# Altium PCB PCB2.PcbDoc (part 1 of 2)
Units mm, origin at the board's own origin, x right, y up, seen from the top; angles counter-clockwise.
Board outline 150 x 116.5 mm, 2 copper layers (Top Layer, Bottom Layer); 107 components, 88 nets, 407 pads, 607 vias.
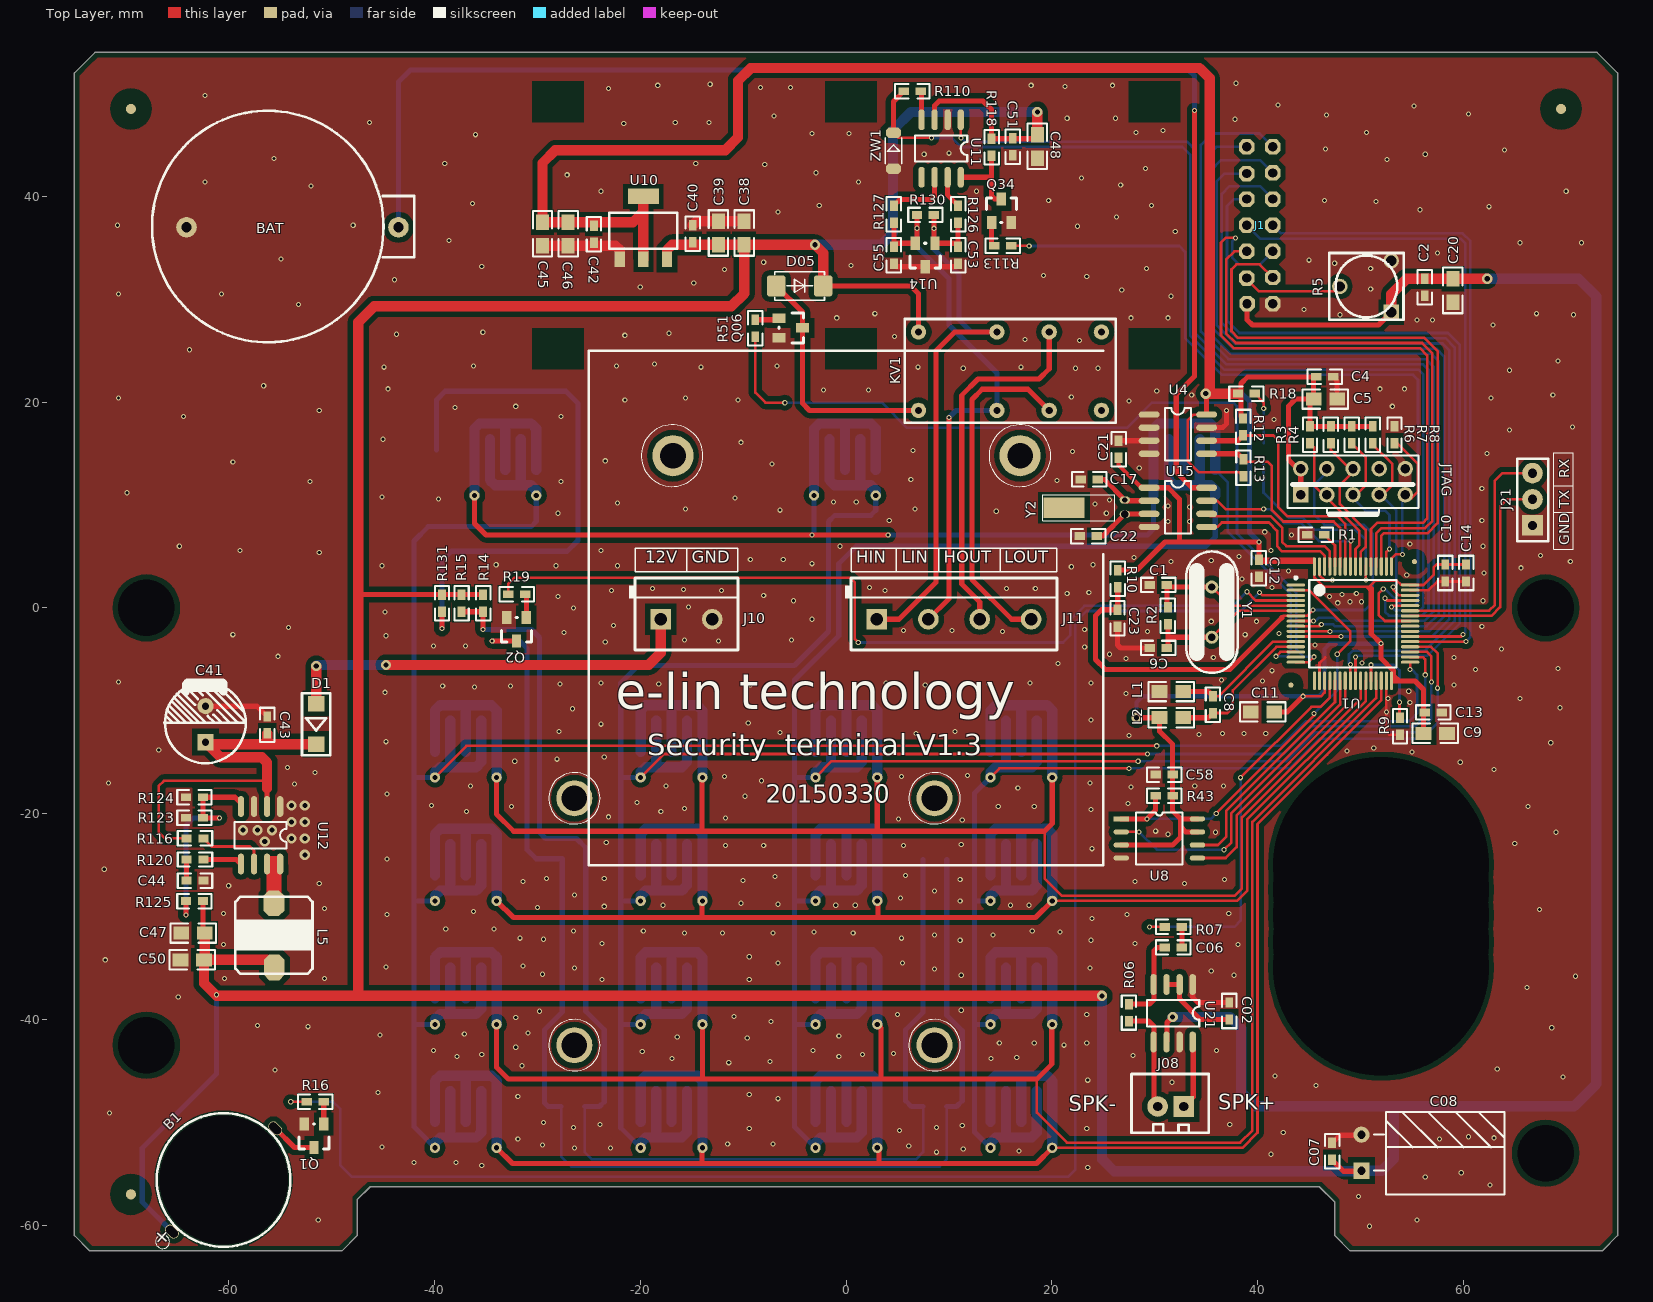
[diagram p0: Top Layer view]
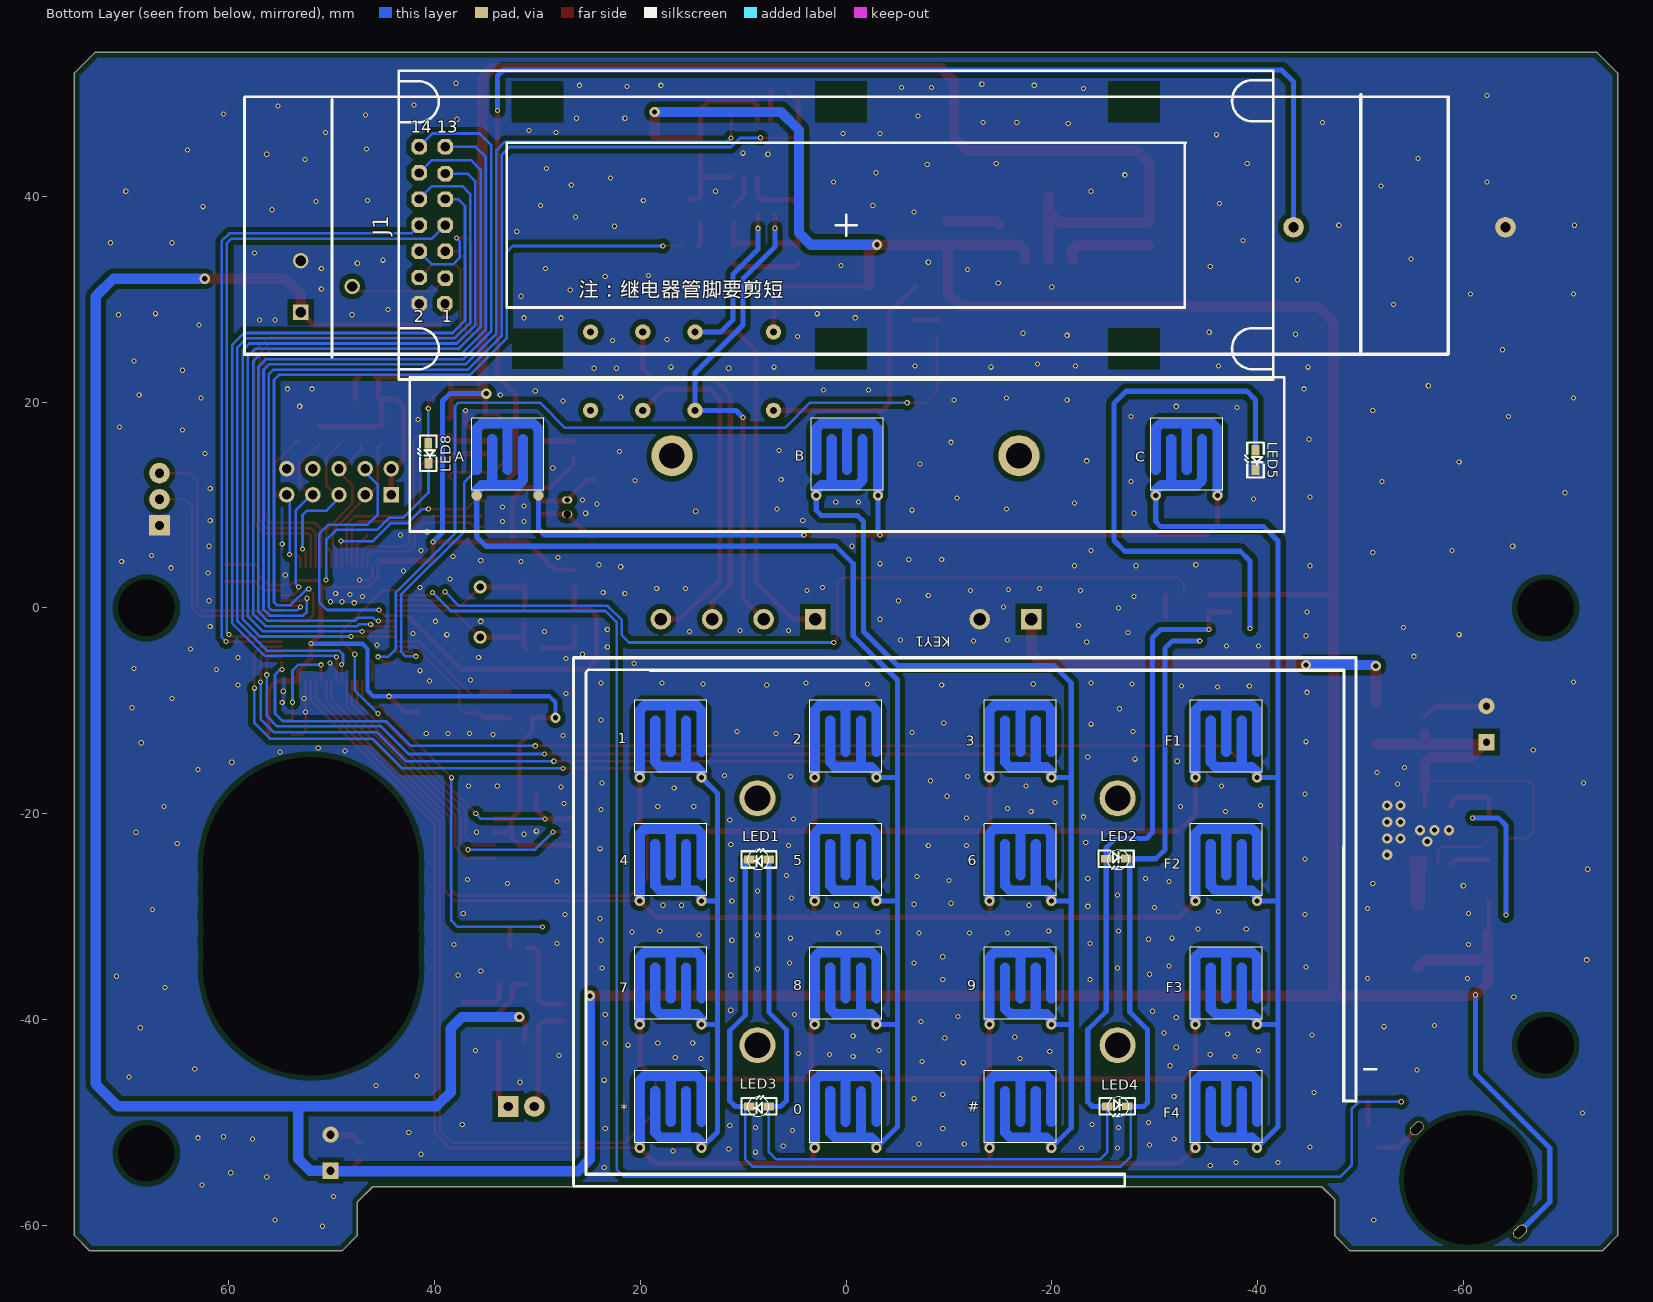
[diagram p1: Bottom Layer view, seen from below]

## Layer stack, top to bottom
Top Solder: solder mask 0.0102, Solder Resist, Dk 3.5
Top Layer: signal copper 0.0356
Dielectric1: dielectric 0.32, FR-4, Dk 4.8
Bottom Layer: signal copper 0.0356
Bottom Solder: solder mask 0.0102, Solder Resist, Dk 3.5

## Board outline
-75,-61 -73.5,-62.5 -49,-62.5 -47.5,-61 -47.5,-57.5 -46.25,-56.25 46,-56.25 47.5,-57.75 47.5,-61 49,-62.5 73.5,-62.5 75,-61 75,52 73,54 -73,54 -75,52

## Design rules (kind name [scope] priority, off if disabled: settings)
Clearance [All] p1: gap=0.5
PolygonConnect [All] p1: connectstyle=Direct reliefconductorwidth=0.5 reliefentries=4 polygonreliefangle="90 Angle" airgapwidth=0.254
RoutingVias [All] p1: holewidth=0.711 width=1.27 viastyle="Through Hole" minholewidth=0.711 minwidth=1.27 maxholewidth=0.711 maxwidth=1.27
SilkToSolderMaskClearance SilkscreenOverComponentPads [IsPad] p1: minsilkscreentomaskgap=0.254 clearancetoexposedcopper=TRUE
SolderMaskExpansion [All] p1: expansion=0.102
Width [All] p1: maxlimit=5 minlimit=0.254 preferedwidth=0.254
28 further rules are at their usual default settings.

## Classes and differential pairs
component class SCH1: BAT C17 C21 C22 C58 R12 R13 R43 U4 U8 U15 Y2
component class SCH2: C02 C06 C07 C08 J08 R06 R07 U21
component class SCH3: B1 C4 C5 C9 C10 C11 C12 C13 C14 C23 J21 JTAG Q1 R3 R4 R6 R7 R8 R10 R16
component class SCH4: C48 C51 C53 C55 D05 J10 J11 KV1 Q06 Q34 R51 R110 R113 R118 R126 R127 R130 U11 U14 ZW1
component class SCH5: C38 C39 C40 C41 C42 C43 C44 C45 C46 C47 C50 D1 L5 LED5 R116 R120 R123 R124 R125 R131 U10 U12
component class SCH6: C2 C20 J1 R5
component class SCH7: KEY1 LED1 LED2 LED3 LED4 Q2 R14 R15 R19
component class SCH8: C1 C6 C8 L1 L2 LED8 R1 R2 R9 R18 U1 Y1

## Components (designator, comment, footprint, x,y, rotation, side; value= is the part's Value field where it differs from the comment)
B1 "BEEP" BEEP-W -60.5,-55.6 r45 top
BAT "BAT-CR2032" CR2032 -43.5,37 r270 top
C1 "22pF" 0603 29.54,2.235 r0 top
C02 "0.1uF" 0603 37.25,-40 r90 top
C2 "0.1uF" 0603 56.25,30.349 r90 top
C4 "0.1uF" 0603 47.344,22.464 r180 top
C5 "10uF" 0805 45.452,20.302 r0 top
C06 "0.1uF" 0603 31,-33 r0 top
C6 "22pF" 0603 29.54,-3.886 r0 top
C07 "0.1uF" 0603 47.25,-52 r270 top
C08 "470uF/25V" RB3.5-W 52.5,-47.7 r90 top
C8 "0.1uF" 0603 35.668,-10.216 r90 top
C9 "10uF" 0805 56.134,-12.192 r0 top
C10 "0.1uF" 0603 58.24,2.572 r90 top
C11 "10uF" 0805 41.631,-10.109 r180 top
C12 "0.1uF" 0603 40.132,3.048 r90 top
C13 "0.1uF" 0603 57.912,-10.16 r180 top
C14 "0.1uF" 0603 60.272,2.572 r90 top
C17 "22pF" 0603 22.8,12.5 r0 top
C20 "10uF" 0805 58.983,32 r270 top
C21 "0.1uF" 0603 26.5,16.25 r270 top
C22 "22pF" 0603 22.733,6.985 r0 top
C23 "0.1uF" 0603 26.391,-1.829 r90 top
C38 "10uF" 0805 -9.9,35.3 r90 top
C39 "10uF" 0805 -12.4,35.3 r90 top
C40 "0.1uF" 0603 -14.9,37.2 r270 top
C41 "470uF/25V" RB3.5 -62.25,-9.55 r270 top
C42 "0.1uF" 0603 -24.5,35.5 r90 top
C43 "0.1uF" 0603 -56.25,-10.55 r270 top
C44 "1nF" 0603 -62.451,-26.5 r180 top
C45 "10uF" 0805 -29.5,37.5 r270 top
C46 "10uF" 0805 -27,37.5 r270 top
C47 "10uF" 0805 -64.6,-31.6 r0 top
C48 "10uF" 0805 18.6,46 r270 top
C50 "10uF" 0805 -62.4,-34.2 r180 top
C51 "0.1uF" 0603 16.2,44 r90 top
C53 "470pF" 0603 10.9,33.45 r90 top
C55 "470pF" 0603 4.65,33.45 r90 top
C58 "0.1uF" 0603 30.1,-16.2 r0 top
D1 "IN4007" SMA(DO-214AC) -51.5,-9.3 r270 top
D05 "1N4007" DO-214AC(SMA) -4.5,31.3 r0 top
J1 "LCD-1602DB" LCD-1602B 43.485,22.2 r0 top
J08 "XH2.54-2P" 2.54 27.75,-51 r0 top
J10 "5.0-2P" 5.0-2 -18,-1.1 r0 top
J11 "5.0-4P" 5.0-4 3,-1.1 r0 top
J21 "2.54*3P插针" 2.54-TX 68.25,6.5 r90 top
JTAG "JTAG" JTAG_10 44.2,11 r0 top
KEY1 "SW-17" KEY-17 -2.032,-18.796 r0 top
KV1 "OMRON" KV 7.25,19 r0 top
L1 "100R" 0805 30.48,-8.128 r0 top
L2 "100R" 0805 30.48,-10.668 r0 top
L5 "4.7uH" "INDUCTOR 7*7" -55.6,-28.7 r90 top
LED1 "RED" LED-0603 7.5,-24.45 r0 bottom
LED2 "RED" LED-0603 -25.3,-24.384 r180 bottom
LED3 "RED" LED-0603 7.5,-48.45 r0 bottom
LED4 "RED" LED-0603 -25.4,-48.45 r180 bottom
LED5 "RED" LED-0603 -39.802,15.342 r270 bottom
LED8 "RED" LED-0603 40.6,16 r270 bottom
Q1 "8050" SOT-23 -50.758,-50.171 r180 top
Q2 "8050" SOT-23 -31.071,-0.912 r180 top
Q06 "8050" SOT-23 -6.528,28.169 r270 top
Q34 "8050" SOT-23 14.15,37.45 r0 top
R1 "10K" 0603 46.5,7.112 r180 top
R2 "1M" 0603 31.284,-1.567 r90 top
R3 "10K" 0603 45.098,17.65 r270 top
R4 "10K" 0603 47.13,15.999 r90 top
R5 "10K" RM065-V1 48,31.25 r0 top
R06 "33K" 0603 27.5,-38.5 r270 top
R6 "10K" 0603 49.162,17.65 r270 top
R07 "10K" 0603 31,-31 r0 top
R7 "10K" 0603 51.194,17.65 r270 top
R8 "10K" 0603 53.315,17.678 r270 top
R9 "10K" 0603 53.848,-12.319 r90 top
R10 "10K" 0603 26.416,2.032 r90 top
R12 "4.7K" 0603 38.6,16.764 r90 top
R13 "4.7K" 0603 38.633,14.453 r270 top
R14 "510R" 0603 -35.267,-0.37 r90 top
R15 "510R" 0603 -37.367,-0.37 r90 top
R16 "1K" 0603 -52.4,-48 r0 top
R18 "1K" 0603 39.751,20.828 r180 top
R19 "1K" 0603 -31.167,1.33 r180 top
R43 "10K" 0603 30.099,-18.25 r0 top
R51 "1K" 0603 -8.814,26.365 r90 top
R110 "120R" 0603 7.264,50.216 r180 top
R113 "1K" 0603 14.4,35.2 r0 top
R116 "10K" 0603 -62.451,-22.4 r180 top
R118 "1K" 0603 14.15,43.95 r90 top
R120 "20K" 0603 -64.101,-24.45 r0 top
R123 "20K" 0603 -64.151,-20.4 r0 top
R124 "22K" 0603 -64.151,-18.4 r0 top
R125 "56K" 0603 -64.151,-28.5 r0 top
R126 "10R" 0603 10.9,37.45 r90 top
R127 "10R" 0603 4.65,37.45 r90 top
R130 "120R" 0603 6.9,38.2 r0 top
R131 "1K" 0603 -39.268,-0.356 r90 top
U1 "STM32F103RCT6" LQFP64_N 49.276,-1.524 r0 top
U4 "24C256" SO-8 29.464,18.796 r0 top
U8 "SST25VF016B" SOIC-8 26.75,-20.5 r0 top
U10 "LM1117-3.3V" SOT-223 -22,33.9 r0 top
U11 "TJA1050" SO-8 11.15,47.45 r270 top
U12 "AOZ1016" SO-8 -55,-19.3 r270 top
U14 "NUP2105L" SOT-23 8.65,35.45 r180 top
U15 "DS1302" SO-8 29.464,11.684 r0 top
U21 "8002" SO-8 33.7,-36.6 r270 top
Y1 "8MHz" XTAL_US 35.56,2.032 r270 top
Y2 "CRYSTAL" CS206 27.1,9.1 r0 top
ZW1 "3.3V" LL-34 4.623,42.697 r90 top

## Footprints (in the part's own frame and the unit in brackets; to place one, negate y for a bottom-side part, rotate by r counter-clockwise, add the part's x,y. Pads: shape width x height; smd on the part's side, far side on the other; paste and mask are expansions set on the pad)
2.54 [mm]
  rect 2x2 hole 0.9: 1(5.08,2.54)
  round 2 hole 0.9: 2(2.54,2.54)
  silkscreen extent 0,0 7.5,5.7
2.54-TX [mm]
  round 2 hole 0.9: 1(6.604,1.524) 2(4.064,1.524)
  rect 2x2 hole 0.9: 3(1.524,1.524)
  silkscreen extent 0,0 8,3
5.0-2 [mm]
  rect 2x2 hole 1.2: 1(0,0)
  round 2 hole 1.2: 2(5,0)
  silkscreen extent -3.1,-3 7.5,4
5.0-4 [mm]
  rect 2x2 hole 1.2: 1(0,0)
  round 2 hole 1.2: 2(5,0) 3(10,0) 4(15,0)
  silkscreen extent -3.1,-3 17.5,4
0603 [mil]
  rect 40x30 smd: 1(0,0) 2(65,0)
  silkscreen extent -33,-28 98,28
0805 [mil]
  rect 60x50 smd: 1(0,0) 2(90,0)
  silkscreen extent -42,-37 132,37
BEEP-W [mm]
  oval 1x1.5 hole 0.8 slot 1.3 at 90 deg: 1(-7.1,0) 2(7.1,0)
  round 0 hole 12.5: ""(0,0)
  silkscreen extent -6.5,-6.5 6.5,6.5
CR2032 [mm]
  round 2 hole 1: 1(0,0) 2(0,-20.6)
  silkscreen extent -11.32,-23.95 11.18,1.52
CS206 [mm]
  oval 1x0.7 hole 0.7: 1(0,0)
  oval 1x0.7 hole 0.5: 2(0,1.4)
  rect 4x2 smd: 3(-5.9,0.65)
  silkscreen extent -8,-0.6 -1,1.9
DO-214AC(SMA) [mil]
  rrect25% 70x80 smd: 1(-90,0) 2(90,0)
  silkscreen extent -95,-55 95,55, body extent -108,-55 108,55, height 91
"INDUCTOR 7*7" [mm]
  oct 2.5x2 smd: 1(0,0) 2(-6.239,-0.026)
  silkscreen extent -6.86,-3.74 0.64,3.76
JTAG_10 [mm]
  rect 1.5x1.5 hole 0.9: 1(0,0)
  round 1.5 hole 0.9: 2(0,2.54) 3(2.54,0) 4(2.54,2.54) 5(5.08,0) 6(5.08,2.54) 7(7.62,0) 8(7.62,2.54) 9(10.16,0) 10(10.16,2.54)
  silkscreen extent -1.27,-1.78 11.43,3.81
KEY-17 [mm]
  round 1 hole 0.5: 1(22.075,2.325) 2(16.075,2.325) 3(5.075,2.325) 4(-0.925,2.325) 5(-11.925,2.325) 6(-17.925,2.325) 7(-31.925,2.325) 8(-37.925,2.325) 9(22.075,-9.675) 10(16.075,-9.675) 11(5.075,-9.675) 12(-0.925,-9.675) 13(-11.925,-9.675) 14(-17.925,-9.675) 15(-31.925,-9.675) 16(-37.925,-9.675) 17(22.075,-21.675) 18(16.075,-21.675) 19(5.075,-21.675) 20(-0.925,-21.675) 21(-11.925,-21.675) 22(-17.925,-21.675) 23(-31.925,-21.675) 24(-37.925,-21.675) 25(22.075,-33.675) 26(16.075,-33.675) 27(5.075,-33.675) 28(-0.925,-33.675) 29(-11.925,-33.675) 30(-17.925,-33.675) 31(-31.925,-33.675) 32(-37.925,-33.675) 35(-1.075,29.725) 36(4.925,29.725) 37(-34.075,29.725) 38(-28.075,29.725)
  round 1 smd far side: 33(31.925,29.725) 34(37.925,29.725)
  Bottom Layer lines w1: -37.925,-33.675 -37.925,-33.175 -37.425,-32.675 -33.925,-32.675 -33.425,-32.175 -33.425,-28.175 ; -37.925,-31.175 -37.925,-27.175 -37.425,-26.675 -32.425,-26.675 -31.925,-27.175 -31.925,-33.675 ; -37.925,-21.675 -37.925,-21.175 -37.425,-20.675 -33.925,-20.675 -33.425,-20.175 -33.425,-16.175 ; -37.925,-19.175 -37.925,-15.175 -37.425,-14.675 -32.425,-14.675 -31.925,-15.175 -31.925,-21.675 ; -37.925,-9.675 -37.925,-9.175 -37.425,-8.675 -33.925,-8.675 -33.425,-8.175 -33.425,-4.175 ; -37.925,-7.175 -37.925,-3.175 -37.425,-2.675 -32.425,-2.675 -31.925,-3.175 -31.925,-9.675 ; -37.925,2.325 -37.925,2.825 -37.425,3.325 -33.925,3.325 -33.425,3.825 -33.425,7.825 ; -37.925,4.825 -37.925,8.825 -37.425,9.325 -32.425,9.325 -31.925,8.825 -31.925,2.325 ; -36.425,-32.675 -36.425,-28.175 ; -36.425,-20.675 -36.425,-16.175 ; -36.425,-8.675 -36.425,-4.175 ; -36.425,3.325 -36.425,7.825 ; -34.925,-31.175 -34.925,-26.675 ; -34.925,-19.175 -34.925,-14.675 ; -34.925,-7.175 -34.925,-2.675 ; -34.925,4.825 -34.925,9.325 ; -34.075,29.725 -34.075,36.225 -33.575,36.725 -28.575,36.725 -28.075,36.225 -28.075,32.225 ; -32.575,35.225 -32.575,31.225 -32.075,30.725 -28.575,30.725 -28.075,30.225 -28.075,29.725 ; -31.075,32.225 -31.075,36.725 ; -29.575,30.725 -29.575,35.225 ; -17.925,-33.675 -17.925,-33.175 -17.425,-32.675 -13.925,-32.675 -13.425,-32.175 -13.425,-28.175 ; -17.925,-31.175 -17.925,-27.175 -17.425,-26.675 -12.425,-26.675 -11.925,-27.175 -11.925,-33.675 ; -17.925,-21.675 -17.925,-21.175 -17.425,-20.675 -13.925,-20.675 -13.425,-20.175 -13.425,-16.175 ; -17.925,-19.175 -17.925,-15.175 -17.425,-14.675 -12.425,-14.675 -11.925,-15.175 -11.925,-21.675 ; -17.925,-9.675 -17.925,-9.175 -17.425,-8.675 -13.925,-8.675 -13.425,-8.175 -13.425,-4.175 ; -17.925,-7.175 -17.925,-3.175 -17.425,-2.675 -12.425,-2.675 -11.925,-3.175 -11.925,-9.675 ; -17.925,2.325 -17.925,2.825 -17.425,3.325 -13.925,3.325 -13.425,3.825 -13.425,7.825 ; -17.925,4.825 -17.925,8.825 -17.425,9.325 -12.425,9.325 -11.925,8.825 -11.925,2.325 ; -16.425,-32.675 -16.425,-28.175 ; -16.425,-20.675 -16.425,-16.175 ; -16.425,-8.675 -16.425,-4.175 ; -16.425,3.325 -16.425,7.825 ; -14.925,-31.175 -14.925,-26.675 ; -14.925,-19.175 -14.925,-14.675 ; -14.925,-7.175 -14.925,-2.675 ; -14.925,4.825 -14.925,9.325 ; -1.075,29.725 -1.075,36.225 -0.575,36.725 4.425,36.725 4.925,36.225 4.925,32.225 ; -0.925,-33.675 -0.925,-33.175 -0.425,-32.675 3.075,-32.675 3.575,-32.175 3.575,-28.175 ; -0.925,-31.175 -0.925,-27.175 -0.425,-26.675 4.575,-26.675 5.075,-27.175 5.075,-33.675 ; -0.925,-21.675 -0.925,-21.175 -0.425,-20.675 3.075,-20.675 3.575,-20.175 3.575,-16.175 ; -0.925,-19.175 -0.925,-15.175 -0.425,-14.675 4.575,-14.675 5.075,-15.175 5.075,-21.675 ; -0.925,-9.675 -0.925,-9.175 -0.425,-8.675 3.075,-8.675 3.575,-8.175 3.575,-4.175 ; -0.925,-7.175 -0.925,-3.175 -0.425,-2.675 4.575,-2.675 5.075,-3.175 5.075,-9.675 ; -0.925,2.325 -0.925,2.825 -0.425,3.325 3.075,3.325 3.575,3.825 3.575,7.825 ; -0.925,4.825 -0.925,8.825 -0.425,9.325 4.575,9.325 5.075,8.825 5.075,2.325 ; 0.425,35.225 0.425,31.225 0.925,30.725 4.425,30.725 4.925,30.225 4.925,29.725 ; 0.575,-32.675 0.575,-28.175 ; 0.575,-20.675 0.575,-16.175 ; 0.575,-8.675 0.575,-4.175 ; 0.575,3.325 0.575,7.825 ; 1.925,32.225 1.925,36.725 ; 2.075,-31.175 2.075,-26.675 ; 2.075,-19.175 2.075,-14.675 ; 2.075,-7.175 2.075,-2.675 ; 2.075,4.825 2.075,9.325 ; 3.425,30.725 3.425,35.225 ; 16.075,-33.675 16.075,-33.175 16.575,-32.675 20.075,-32.675 20.575,-32.175 20.575,-28.175 ; 16.075,-31.175 16.075,-27.175 16.575,-26.675 21.575,-26.675 22.075,-27.175 22.075,-33.675 ; 16.075,-21.675 16.075,-21.175 16.575,-20.675 20.075,-20.675 20.575,-20.175 20.575,-16.175 ; 16.075,-19.175 16.075,-15.175 16.575,-14.675 21.575,-14.675 22.075,-15.175 22.075,-21.675 ; 16.075,-9.675 16.075,-9.175 16.575,-8.675 20.075,-8.675 20.575,-8.175 20.575,-4.175 ; 16.075,-7.175 16.075,-3.175 16.575,-2.675 21.575,-2.675 22.075,-3.175 22.075,-9.675 ; 16.075,2.325 16.075,2.825 16.575,3.325 20.075,3.325 20.575,3.825 20.575,7.825 ; 16.075,4.825 16.075,8.825 16.575,9.325 21.575,9.325 22.075,8.825 22.075,2.325 ; 17.575,-32.675 17.575,-28.175 ; 17.575,-20.675 17.575,-16.175 ; 17.575,-8.675 17.575,-4.175 ; 17.575,3.325 17.575,7.825 ; 19.075,-31.175 19.075,-26.675 ; 19.075,-19.175 19.075,-14.675 ; 19.075,-7.175 19.075,-2.675 ; 19.075,4.825 19.075,9.325 ; 31.925,29.725 31.925,36.225 32.425,36.725 37.425,36.725 37.925,36.225 37.925,32.225 ; 33.425,35.225 33.425,31.225 33.925,30.725 37.425,30.725 37.925,30.225 37.925,29.725 ; 34.925,32.225 34.925,36.725 ; 36.425,30.725 36.425,35.225
KV [mm]
  round 1.5 hole 0.7: 1(-0.2,0.2) 4(7.42,0.2) 6(12.5,0.2) 8(17.58,0.2) 9(17.58,7.82) 11(12.5,7.82) 13(7.42,7.82) 16(-0.2,7.82)
  silkscreen extent -1.52,-1.02 18.98,9.08
LCD-1602B [mm]
  oct 1.5x1.5 hole 0.9: 1(-4.5,7.38) 2(-2,7.38) 3(-4.54,9.86) 4(-2,9.92) 5(-4.54,12.46) 6(-2,12.46) 7(-4.54,15) 8(-2,15) 9(-4.54,17.54) 10(-2,17.54) 11(-4.54,20.02) 12(-2,20.08) 13(-4.54,22.62) 14(-2,22.62)
LED-0603 [mil]
  rect 40x30 smd: 1(0,0) 2(75.4,0.63)
  silkscreen extent -29,-39 105,31
LL-34 [mm]
  oct 1x1.45 smd: 1(0,0) 2(3.5,0)
  silkscreen extent 0.5,-0.8 3,0.8
LQFP64_N [mm] "Thin QFP, 64-Leads, Body 10x10mm, Pitch 0.5mm, IPC Medium Density"
  oval 1.8x0.3 smd: 1(-5.55,3.75) 2(-5.55,3.25) 3(-5.55,2.75) 4(-5.55,2.25) 5(-5.55,1.75) 6(-5.55,1.25) 7(-5.55,0.75) 8(-5.55,0.25) 9(-5.55,-0.25) 10(-5.55,-0.75) 11(-5.55,-1.25) 12(-5.55,-1.75) 13(-5.55,-2.25) 14(-5.55,-2.75) 15(-5.55,-3.25) 16(-5.55,-3.75) 33(5.55,-3.75) 34(5.55,-3.25) 35(5.55,-2.75) 36(5.55,-2.25) 37(5.55,-1.75) 38(5.55,-1.25) 39(5.55,-0.75) 40(5.55,-0.25) 41(5.55,0.25) 42(5.55,0.75) 43(5.55,1.25) 44(5.55,1.75) 45(5.55,2.25) 46(5.55,2.75) 47(5.55,3.25) 48(5.55,3.75)
  oval 0.3x1.8 smd: 17(-3.75,-5.55) 18(-3.25,-5.55) 19(-2.75,-5.55) 20(-2.25,-5.55) 21(-1.75,-5.55) 22(-1.25,-5.55) 23(-0.75,-5.55) 24(-0.25,-5.55) 25(0.25,-5.55) 26(0.75,-5.55) 27(1.25,-5.55) 28(1.75,-5.55) 29(2.25,-5.55) 30(2.75,-5.55) 31(3.25,-5.55) 32(3.75,-5.55) 49(3.75,5.55) 50(3.25,5.55) 51(2.75,5.55) 52(2.25,5.55) 53(1.75,5.55) 54(1.25,5.55) 55(0.75,5.55) 56(0.25,5.55) 57(-0.25,5.55) 58(-0.75,5.55) 59(-1.25,5.55) 60(-1.75,5.55) 61(-2.25,5.55) 62(-2.75,5.55) 63(-3.25,5.55) 64(-3.75,5.55)
  silkscreen extent -5.67,-4.25 4.25,4.57, body extent -5,-5 5,5, height 1.6
RB3.5 [mil]
  rect 62x62 hole 28: 1(137.8,0)
  round 62 hole 28: 2(0,0)
  silkscreen extent -92,-158 218,155
RB3.5-W [mil]
  rect 62x62 hole 32: 1(-275.59,94.49)
  round 62 hole 32: 2(-137.8,94.49)
  silkscreen extent -366,-453 -51,47
RM065-V1 [mm]
  rect 1.5x1.5 hole 1: 1(5,-2.5)
  round 1.5 hole 1: 2(0,0) 3(5,2.5)
  silkscreen extent -1.02,-3.25 6.2,3.25
SMA(DO-214AC) [mm]
  rect 1.5x1.6 smd: 1(0,0) 2(3.95,0)
  silkscreen extent -1,-1.38 5,1.38
SO-8 [mil]
  oval 80x24 smd: 1(0,0) 2(0,-50) 3(0,-100) 4(0,-150) 5(220,-150) 6(220,-100) 7(220,-50) 8(220,0)
  silkscreen extent 60,-175 160,25
SOIC-8 [mm]
  rect 1.5x0.48 smd: 1(0,0)
  oval 1.5x0.48 smd: 2(0,-1.27) 3(0,-2.54) 4(0,-3.81) 5(7.41,-3.81) 6(7.41,-2.54) 7(7.41,-1.27) 8(7.41,0)
  silkscreen extent 1.43,-4.44 5.97,0.64
SOT-23 [mil]
  rect 36x50 smd: 1(0,0) 2(75,0) 3(37.5,90)
  silkscreen extent -20,0 95,95
SOT-223 [mm]
  rect 1x1.5 smd: 1(0,0) 2(2.3,0) 3(4.6,0)
  rect 3x1.5 smd: 4(2.3,6.096)
  silkscreen extent -1,1.02 5.59,4.52
XTAL_US [mil]
  round 50 hole 28: 1(0,0) 2(192.13,0)
  silkscreen extent -136,-98 328,98

## Part data
B1: "TMB12A05  5V有源电磁蜂鸣器"
BAT: "CR2032电池座"
C1 C02 C2 C4 C06 C6 C07 C8 C10 C12 C13 C14 C17 C21 C22 C23 C40 C42 C43 C44 C51 C53 C55: library part CAP-0603, "0603陶瓷贴片电容"
C5 C9 C11 C20 C38 C39 C45 C46 C47 C48 C50: library part CAP-0805, "0805陶瓷贴片电容"
C08 C41: "470uF/25V电解电容"
C58: library part CAP
D1: "整流二极管"
D05: "1A整流二极管"
J08: "XH2.54-2A"
J10: "WJ301V-5.00-2P"
J11: "WJ301V-5.00-4P"
J21: "2.54mm*3P单排插针"
JTAG: "2.54*5*2   2.54mm 5P双排排阵"
KEY1: "终端操作按键"
KV1: "omron G5V-2 12VDC"
L1 L2 L5: library part INDUCTOR
LED1 LED2 LED3 LED4 LED5 LED8: library part LED-0603, "LED贴片发光二极管0603封装"
Q1 Q2 Q34: "8050 NPN型三极管"
Q06: library part NPN1
R1 R2 R3 R4 R06 R6 R07 R7 R8 R9 R10 R12 R13 R14 R15 R16 R18 R19 R43 R110 R113 R116 R118 R120 R123 R124 R125 R126 R127 R130 R131: library part RES-0603, "陶瓷贴片电阻0603封装"
R5: library part POT2, "三端可调电位器10K"
R51: library part RES1
U1: library part STM32F103RBT6, "STM32F103RCT6   LQFP64封装"
U4: "E2PROM"
U8: "SST25VF016  SPI FLASH"
U11: "TJA1050   CANоƬ"
U12: "DC-DC降压电源管理芯片"
U14: "NUP2105L  TVS三极管"
U15: "DS1302   时钟芯片"
U21: "音频功放IC"
Y1: library part XTAL, "Crystal Oscillator"
Y2: "晶体振荡器2*6"
ZW1: "ZMM3V3"

## Free pads (board coordinates)
  round 0.5 smd mask+0.5: 0(43.25,-7.5) 0(55.25,4.5)
  round 1 smd mask+1: 2(-69.5,-57) 2(-69.5,48.5) 2(69.5,48.5)
  round 0 hole 5.5: ""(-68,-42.5) ""(-68,0) ""(68,-53) ""(68,0)
  round 3.5 hole 2.5: ""(-26.4,-42.5) ""(-26.4,-18.5) ""(8.6,-42.5) ""(8.6,-18.5)
  round 4 hole 2.5: ""(-16.825,14.8) ""(16.925,14.8)
  round 0 hole 21: ""(51.994,-34.95) ""(51.994,-32.461) ""(51.994,-29.87) ""(51.994,-27.356) ""(51.994,-24.968)

## Via types
v1: diameter 0.5, hole 0.3, Top Layer to Bottom Layer, tented both sides, 587 vias
v2: diameter 1, hole 0.5, Top Layer to Bottom Layer, tented both sides, 20 vias

## Nets (pads, with @x,y where several pads share a name; then routed paths per layer and width w, separated by ;. In a path a pad name is that pad's centre, name@x,y a point inside that pad or via, vN(x,y) a via of type N, cw(c..) or ccw(c..) an arc to the next point about the centre after c; other vN are vias at no path point)
BEEP: R16.1 U1.3 | length 161.7
  Top Layer w0.254: v1(-53.969,-48) R16.1@-52.4,-48 ; v1(40.2,1.5) 40.474,1.226 U1.3@43.726,1.226 42.274,1.226
  Bottom Layer w0.254: v1(-53.969,-48) -49.841,-48 -49.174,-48.666 -49.174,-54.126 -48,-55.3 21.56,-55.3 22.301,-54.559 22.301,-1.372 23.373,-0.3 38.4,-0.3 v1(40.2,1.5)
CANH: C53.2 J11.1 KV1.13 R126.1 R130.2 U14.1 | length 57.9
  Top Layer w0.5: J11.1@3,-1.1 5.15,-1.1 8.75,2.5 8.75,25 10.57,26.82 KV1.13@14.67,26.82 ; U14.1@8.551,35.549 v1(8.551,36.9) R130.2@8.551,38.2 ; U14.1@8.65,35.45 10.551,35.45 C53.2@10.9,35.101 R126.1@10.9,37.45
  Bottom Layer w0.5: v1(8.551,36.9) 8.551,34.863 11,32.414 11,28 12.18,26.82 KV1.13@14.67,26.82
"CANH OUT": J11.3 KV1.11 | length 35.6
  Top Layer w0.5: J11.3@13,-1.1 13,0.586 11.25,2.336 11.25,20.664 12.836,22.25 18.75,22.25 19.75,23.25 KV1.11@19.75,26.82
CANL: C55.2 J11.2 KV1.4 R127.1 R130.1 U14.2 | length 53.6
  Top Layer w0.5: R127.1@4.65,37.45 C55.2@4.65,35.101 4.999,35.45 U14.2@6.745,35.45 ; U14.2@6.9,35.605 v1(6.9,36.902) R130.1@6.9,38.2 ; J11.2@8,-1.1 10,0.9 v1(10,18.5) ; KV1.4@14.62,19.25 KV1.4@14.67,19.2
  Bottom Layer w0.5: v1(6.9,36.902) 6.9,35.1 10,32 10,27.5 14.67,22.83 KV1.4@14.67,19.2 10.7,19.2 v1(10,18.5)
"CANL OUT": J11.4 KV1.6 | length 33.6
  Top Layer w0.5: J11.4@18,-1.1 16.1,-1.1 12.25,2.75 12.25,20.25 13.25,21.25 17.7,21.25 KV1.6@19.75,19.2
CPU_JDQ1: R51.1 U1.16 | length 84.9
  Top Layer w0.254: R51.1@-8.814,26.365 -8.814,20.93 -7.831,19.947 v1(-5.947,19.947) ; U1.16@43.726,-5.274 44.976,-5.274 v1(45.5,-4.75)
  Bottom Layer w0.254: v1(-5.947,19.947) 3.5,19.947 5.947,17.5 27.303,17.5 29.75,19.947 37.65,19.947 38,19.597 38,7.25 43.75,1.5 43.75,-4 44.5,-4.75 v1(45.5,-4.75)
DAC_OUT1: R07.1 U1.20 | length 38
  Top Layer w0.254: v1(29.5,-31) R07.1@31,-31 ; v1(38.358,-16.5) 45.239,-9.619 46.131,-9.619 47.026,-8.724 U1.20@47.026,-7.074
  Bottom Layer w0.254: v1(29.5,-31) 37.75,-31 38.358,-30.392 v1(38.358,-16.5)
DS_IO: U1.61 U15.6 | length 15.4
  Top Layer w0.254: U15.6@35.5,8.992 35.408,8.9 41.3,8.9 42.4,7.8 42.4,6.4 42.8,6 46.5,6 47.026,5.474 U1.61@47.026,4.026
DS_RST: U1.62 U15.5 | length 14.8
  Top Layer w0.254: U15.5@35.164,7.874 36.1,7.874 36.531,8.305 41.095,8.305 41.9,7.5 41.9,6 42.4,5.5 46.1,5.5 46.526,5.074 U1.62@46.526,4.026
DS_SCLK: U1.57 U15.7 | length 18.1
  Top Layer w0.254: U15.7@35.164,10.414 36.086,10.414 36.9,9.6 v1(40.6,9.6) ; U1.57@49.026,4.026 49.026,6.426 v1(49.1,6.5)
  Bottom Layer w0.254: v1(40.6,9.6) 41.234,9.6 42.588,8.246 44.221,8.246 45.967,6.5 v1(49.1,6.5)
F_CS: R43.1 U1.2 U8.1 | length 42.1
  Top Layer w0.254: v1(35.986,-19.986) 45.5,-10.471 v1(45.5,-10.25) ; U1.2@43.726,1.726 45.024,1.726 49,-2.25 49,-3.25 v1(47.75,-4.5)
  Top Layer w0.5: U8.1@26.75,-20.5 v1(29.25,-20.5) 30.099,-19.651 R43.1@30.099,-18.25
  Bottom Layer w0.254: v1(29.25,-20.5) 35.471,-20.5 v1(35.986,-19.986) ; v1(45.5,-10.25) 47.75,-8 v1(47.75,-4.5)
GND: BAT.2 C1.1 C2.1 C02.2 C4.1 C5.2 C6.1 C07.1 C08.2 C9.2 C10.1 C11.2 C12.1 C13.1 C14.1 C17.1 C20.2 C21.1 C22.1 C23.1 C38.2 C39.2 C40.1 C41.2 C42.1 C43.1 C44.1 C45.2 C46.2 C47.1 C48.2 C50.2 C51.1 C53.1 C55.1 C58.1 J1.2 J10.2 J21.3 JTAG.10 L1.1 LED5.2 Q1.2 Q2.2 Q06.2 Q34.2 R1.2 R5.3 R8.1 R9.1 R123.1 R124.1 U1.18 U1.31 U1.47 U1.63 U4.1 U4.2 U4.3 U4.4 U4.7 U8.4 U10.1 U11.2 U12.1 U12.3 U14.3 U15.4 U21.1 U21.7 ZW1.1 | length 65.8
  Top Layer w0.254: U1.18@46.026,-7.074 46.026,-5.326 46.074,-5.326 46.6,-4.8 ; U1.63@46.026,4.026 46.026,3.174 46.5,2.7 v1(47.3,2.7) ; U1.31@52.526,-7.074 52.526,-12.026 52.819,-12.319 R9.1@53.848,-12.319 ; U1.47@54.826,1.726 56.626,1.726 57.472,2.572 C10.1@58.24,2.572 C14.1@60.272,2.572
  Top Layer w0.5: C41.2@-62.25,-9.55 -57.25,-9.55 C43.1@-56.25,-10.55 ; C55.1@4.65,33.45 4.936,33.164 U14.3@7.698,33.164 10.614,33.164 C53.1@10.9,33.45 ; C23.1@26.391,-1.829 26.391,-3.607 26.67,-3.886 C6.1@29.54,-3.886 ; C21.1@26.506,16.256 U4.3@29.464,16.256 ; U21.1@33.7,-36.6 33.7,-37.866 34.183,-38.349 C02.2@37.25,-38.349 C02.2@37.099,-38.5 ; U4.7@35.052,17.526 36.626,17.526 37,17.9 v1(37,19.2) ; C07.1@47.25,-52 48,-51.25 C08.2@50.1,-51.25 ; C4.1@47.344,22.464 47.738,22.07 C5.2@47.738,20.302
  Top Layer w1: C45.2@-29.5,35.214 C46.2@-27,35.214 -22.414,35.214 -22,34.8 U10.1@-22,33.9 ; C40.1@-14.9,37.2 -14.514,37.586 C39.2@-12.4,37.586 C38.2@-9.9,37.586
  other v1: 50.9,-60.1 -51.3,-59.5 55.5,-59.5 49.8,-57.2 62.6,-56.1 56.3,-55.3 59.8,-54.9 23.5,-54.4 -35.4,-54.2 -42,-53.9 -37.9,-53.9 41.3,-53.1 8.8,-52.9 16.8,-52.8 11.4,-52.6 -26.4,-52.5 -22.9,-52.5 -45.1,-52.4 6.1,-52.3 -29.5,-52.2 -11.5,-52.1 -7.1,-52.1 -31.9,-51.6 57.7,-51.6 63,-51.5 60.5,-51.4 42.5,-51 5.2,-50.8 -9.4,-50.6 23.4,-50.6 -26.5,-50.5 8.8,-50.5 11.3,-50.3 -23.9,-50.2 37.3,-50.2 -29.4,-50 -71.6,-49.1 -6.6,-47.7 -31.9,-47.5 -9.4,-47.3 -45.5,-47.1 45.7,-46.4 31.7,-46.1 23.5,-45.9 69.7,-45.6 41.7,-45.5 -55.5,-44.9 63.3,-44.8 -31.5,-44.5 -11.4,-44.2 -7.4,-44.1 -16.9,-43.8 14.1,-43.8 16.6,-43.7 -37.8,-43.6 -0.7,-43.6 27.9,-43.5 -35.4,-43.4 1.6,-43.4 4.6,-43.3 -19.8,-43.1 -40.1,-43 -3.2,-43 36,-43 -32.1,-42.7 21.2,-42.5 14.9,-42.3 18.3,-42.3 23.4,-42.3 -9.6,-41.8 -16.4,-41.7 -0.7,-41.6 -45.3,-41.5 -37.1,-41.4 -30.9,-41.3 68.6,-40.8 -52.3,-40.7 -57.2,-40.6 -7.3,-40.2 -32.1,-39.8 -10.9,-39.7 5,-39.5 23.4,-39.5 -29.8,-39.2 11.2,-39.1 -64.9,-37.8 66.2,-36.9 -23.7,-36.1 -9.4,-36.1 -60.4,-36 -50.7,-36 70.9,-35.8 11.2,-35.7 37.7,-35.7 -29.5,-35.6 35.5,-35.3 8.6,-35.1 -26.4,-35 23.7,-35 -44.7,-34.9 -31.4,-34.8 -6.6,-34.5 5.5,-34.5 -72,-34.2 -9.4,-33.9 -60.5,-32.7 38.1,-32.7 -23.7,-32.6 28.1,-32.6 11.1,-32.3 23.8,-32.3 -29.4,-32.2 -31.7,-32.1 5.4,-32.1 8.6,-31.8 14.3,-31.8 -15.7,-31.6 -12,-31.6 -7.1,-31.6 0.7,-31.6 -3.1,-31.5 20.8,-31.5 -26.5,-31.4 -19.7,-31.4 18.1,-31.4 -38.9,-31.2 -34.2,-31.2 23.9,-30.2 -44.6,-29.8 27.3,-29.8 -60.5,-29.7 37.2,-29.7 -36.2,-29.5 67.4,-29.3 -50.7,-29.2 -30,-29.1 -23.5,-29 -17.8,-28.9 -1,-28.9 0.9,-28.9 16,-28.9 17.8,-28.9 -6.6,-28.8 -10.2,-28.7 11.1,-28.5 5.3,-28.2 -26.4,-27.9 8.6,-27.5 -60,-27 -51.2,-26.8 32.9,-26.8 -31.4,-26.6 28.1,-26.6 -10,-26.5 11.1,-26.4 36.8,-26.4 -29.1,-26.3 -23.5,-26.3 -6.9,-26.1 5.8,-26 -72.1,-25.4 -44.6,-24.4 23.9,-23.4 -11.7,-23.1 -8,-23.1 5.6,-23.1 11.2,-23 65,-22.9 -23.3,-22.8 31.3,-22 35.9,-21.8 69,-21.8 30.1,-21.7 11.3,-20.6 5.1,-20.5 -11.7,-20.4 -23.1,-20.3 -36.9,-19.8 -18,-19.8 23.8,-19.6 -15.7,-19.5 -32.5,-19.3 14.8,-19.3 18.3,-19.3 66.3,-19.3 -40.3,-19.2 27.4,-19 -20.3,-18.9 -9.8,-18.3 -44.6,-18.1 16.7,-17.5 27.7,-17.4 -36.5,-17.3 -17.5,-17.3 33.9,-17.3 36.7,-17.3 -53.6,-17.1 -71.7,-17 23.7,-17 -8.2,-16.8 -11.8,-16.4 5.4,-16.4 11.8,-16.3 -51.6,-16 63,-15.7 -54.3,-15.5 59.7,-15 -32.2,-14.9 -28.1,-14.7 -23.5,-14.5 55,-14 48.7,-13.9 -66.8,-13.8 51.3,-13.6 68.5,-13.1 -44.7,-13 27.5,-12.4 34.3,-12.3 6.8,-12.2 36.6,-12.2 38.7,-12.2 40.8,-12.2 -6.4,-12.1 -27.9,-12 10.6,-12 -23.8,-11.3 -9.5,-11.2 23.8,-10.9 52.526,-10.1 -26.6,-9.8 69.4,-9.7 54.8,-9.2 52.665,-8.791 65.5,-8.8 27.2,-8.3 -44.8,-8.2 54.7,-8.1 -36.1,-7.7 -39.2,-7.6 -32.6,-7.6 -9.3,-7.5 7.7,-7.5 59.1,-7.5 -27.8,-7.4 -18.2,-7.4 -2.1,-7.4 13.9,-7.4 -23.8,-7.3 3.9,-7.3 17.9,-7.3 23.8,-7.3 -70.7,-7.2 40.5,-7.1 36.5,-7 41.4,-6.1 61.2,-6 69.2,-5.9 20.6,-5.4 50.165,-5.347 27.2,-4.9 35.7,-4.8 59.1,-4.8 -55.2,-4.7 25.6,-4.5 63.7,-4 23.2,-3.8 -40.1,-3.7 -37,-3.7 45.6,-3.6 -23.4,-3.3 -12.4,-3.2 -15.7,-3.1 -5.3,-3.1 -44.7,-2.7 -59.6,-2.6 38.8,-2.6 42.1,-2.5 -27.4,-2.4 15.2,-2.3 29.3,-2.3 5.6,-2.2 10.3,-2.2 23.2,-2.1 -54.2,-1.9 61.8,-1.8 -22.6,-1.7 35.5,-1.3 39.9,-1.3 -3.3,-1.1 -44.8,-0.4 -26.5,0 -15.3,0.1 47.8,0.5 49,0.6 50.1,0.6 -5.1,0.7 61.9,0.7 -28,1.1 47,1.1 -8,1.2 48.2,1.3 21.5,1.4 49.6,1.4 23.6,1.5 -22.8,1.7 -12.1,1.7 3.8,1.7 -15.8,1.8 -18.8,1.9 15.6,1.9 18.4,1.9 2.3,2 41.4,2 38.5,2.8 54.5,3.2 62,3.4 43,3.6 65.6,3.9 21.9,4 -45.1,4.1 -28.2,4.1 -22.2,4.1 -34,4.2 24,4.2 -3.3,4.3 31.6,4.5 70.4,4.5 35.5,4.6 -9.3,4.7 -6.1,4.7 28,4.9 38.2,5 67.5,5.1 -51.2,5.4 -58.9,5.6 -23.8,5.6 41.3,5.6 -64.8,6 -0.6,6 61.9,6 54.8,6.2 43.3,7.1 40.7,7.4 31.3,8.4 33.4,8.4 4.2,8.5 61.8,8.5 -28,9.2 25.3,9.2 14.6,9.4 -6.4,9.5 -15.6,9.6 6.7,9.6 33.4,9.8 31.3,9.9 24.2,10.1 -22.2,10.2 -1.2,10.3 1,10.3 25.6,10.5 -39.6,10.6 -10.8,10.7 -45.1,10.8 -69.9,11.2 61.8,11.6 -52.1,12.3 -27.7,12.3 20.5,12.4 6.3,12.5 28.5,13.6 -7.2,14 -59.6,14.2 -23.4,14.3 62.3,15 22,15.2 6.5,15.3 -10.2,16.1 -45,16.4 64.5,17.3 70.6,17.6 41.6,18.3 -64.4,18.6 -27.7,18.6 -51.2,19.2 -38,19.5 -32.1,19.6 53.1,19.6 27.5,20.1 -21.5,20.2 -10.5,20.2 -70.7,20.4 -15.6,20.4 62.7,20.4 21.9,20.5 33.6,20.7 68.7,20.7 30.2,21.1 -2.2,21.2 2.2,21.2 -44.5,21.3 51.9,21.3 54.3,21.3 -56.6,21.6 64.5,23.1 11.4,23.3 22.3,23.3 24.5,23.3 -44.9,23.4 -14.1,23.4 7,23.4 17,23.4 -36.2,23.5 -22.3,23.5 -6.7,23.5 -18.6,23.7 69.2,24 -63.8,25.1 22.7,26 17.4,26.1 4.7,26.4 -21.5,26.5 -43.7,26.6 -17.2,26.7 -35.3,26.8 62.9,27.5 55.5,28 57,28 -0.9,28.2 27.7,28.2 31.3,28.2 48,28.5 70.7,28.5 2.8,28.6 67.1,28.6 44.5,29 -53.2,29.5 31.6,30.3 -70.7,30.5 -60.7,30.5 26.8,30.9 51,31 -20,31.2 -14.8,31.6 -43.9,31.9 23.4,32.2 19.2,32.3 -11.8,32.9 29.2,33 51,33 -35.4,33.2 0.5,33.3 47.5,33.5 -8,33.6 45,33.8 -54.9,33.9 57.5,34.5 65.5,35.5 71.5,35.5 -38.6,35.7 32,36.6 22.5,37.1 -70.8,37.2 -47.9,37.2 26.3,38 -6.6,38.5 55.8,38.7 62.5,39 -2.6,39.1 29.7,39.1 -36.3,39.3 51.5,39.5 19.7,39.6 46.5,39.6 -23.8,40.5 12.7,40.5 70,40.5 -52,41 26.7,41.1 -62.3,41.4 1.2,41.4 22.9,41.8 -27.1,42.1 -2.9,42.3 29.1,42.7 -7.9,43.1 -39,43.2 -14.6,43.2 52.6,43.6 -55.6,43.7 7.6,44.1 56.3,44.1 10,44.2 64,44.5 46.6,44.6 -36,46 -3.3,46.1 0.3,46.1 28.2,46.2 50.6,46.2 30.8,46.4 -21.6,47.1 -46.3,47.2 -16.6,47.2 -13.3,47.2 37.8,47.5 21.5,47.6 26.2,47.6 -7,47.8 46.7,47.9 60.5,48 55.2,48.8 42,48.9 -62.3,49.8 -23.1,50.5 -8.3,50.6 -5.4,50.6 21.3,50.7 -18.3,50.8 18,50.8 25.9,50.8 -13.2,50.9 37.9,51
  other v2: -52.6,-24 -56.5,-22.7 -53.9,-22.4 -52.6,-22.4 -58.6,-21.6 -57.2,-21.6 -55.8,-21.6 -53.9,-20.8 -52.6,-20.8 -53.9,-19.2 -52.6,-19.2
I2C1_SCL: R12.1 U1.58 U4.6 | length 24.9
  Top Layer w0.254: R12.1@38.6,16.764 41.536,16.764 42,16.3 42,9.8 42.9,8.9 47.8,8.9 48.526,8.174 U1.58@48.526,4.374
  Top Layer w0.5: U4.6@35.052,16.256 38.092,16.256 R12.1@38.6,16.764
I2C1_SDA: R13.1 U1.59 U4.5 | length 22.1
  Top Layer w0.254: R13.1@38.633,14.224 40.976,14.224 41.4,13.8 41.4,9.5 42.5,8.4 47.4,8.4 48.026,7.774 U1.59@48.026,4.026
  Top Layer w0.5: U4.5@35.052,14.986 38.1,14.986 R13.1@38.633,14.453
JTCK: JTAG.9 R8.2 U1.49 | length 15
  Top Layer w0.254: U1.49@53.026,4.026 53.026,4.817 53.416,5.207 v1(54.077,5.207) ; R8.2@53.226,16.126 53.474,16.126 55.6,14 55.6,11.3 54.968,10.668 JTAG.9@54.356,10.668
  Bottom Layer w0.254: v1(54.077,5.207) 54.077,10.389 JTAG.9@54.356,10.668
JTDI: JTAG.5 R6.2 U1.50 | length 15.7
  Top Layer w0.254: R6.2@49.162,15.999 50.5,14.661 50.5,11.892 JTAG.5@49.276,10.668 ; U1.50@52.526,4.026 52.526,5.434 v1(52.832,5.74)
  Bottom Layer w0.254: JTAG.5@49.276,10.668 50.495,9.449 52.4,9.449 52.832,9.017 v1(52.832,5.74)
JTDO: JTAG.6 R4.1 U1.55 | length 14.6
  Top Layer w0.254: R4.1@47.13,15.999 47.13,15.354 49.276,13.208 48,11.932 48,10.1 50.5,7.6 50.5,5.9 50.026,5.426 U1.55@50.026,4.026
JTMS: JTAG.7 R7.2 U1.46 | length 18.5
  Top Layer w0.254: R7.2@51.194,15.999 51.194,15.906 53.1,14 53.1,11.952 JTAG.7@51.816,10.668 ; v1(53.188,2.032) 53.188,1.81 53.772,1.226 U1.46@54.826,1.226
  Bottom Layer w0.254: JTAG.7@51.816,10.668 52.299,10.668 53.467,9.5 53.467,2.311 v1(53.188,2.032)